# Altium PCB HIVE_SIGHT_PANEL ASCII REV Project_PCB_Rev.Project_SCH_Rev.PcbDoc
Units mm, origin at the board's own origin, x right, y up, seen from the top; angles counter-clockwise.
Board outline 177.8 x 133.25 mm, 4 copper layers (Top, GND, PWR, Bottom), stack 1.534 mm thick; 8 components, 195 nets, 6 pads, 0 vias.
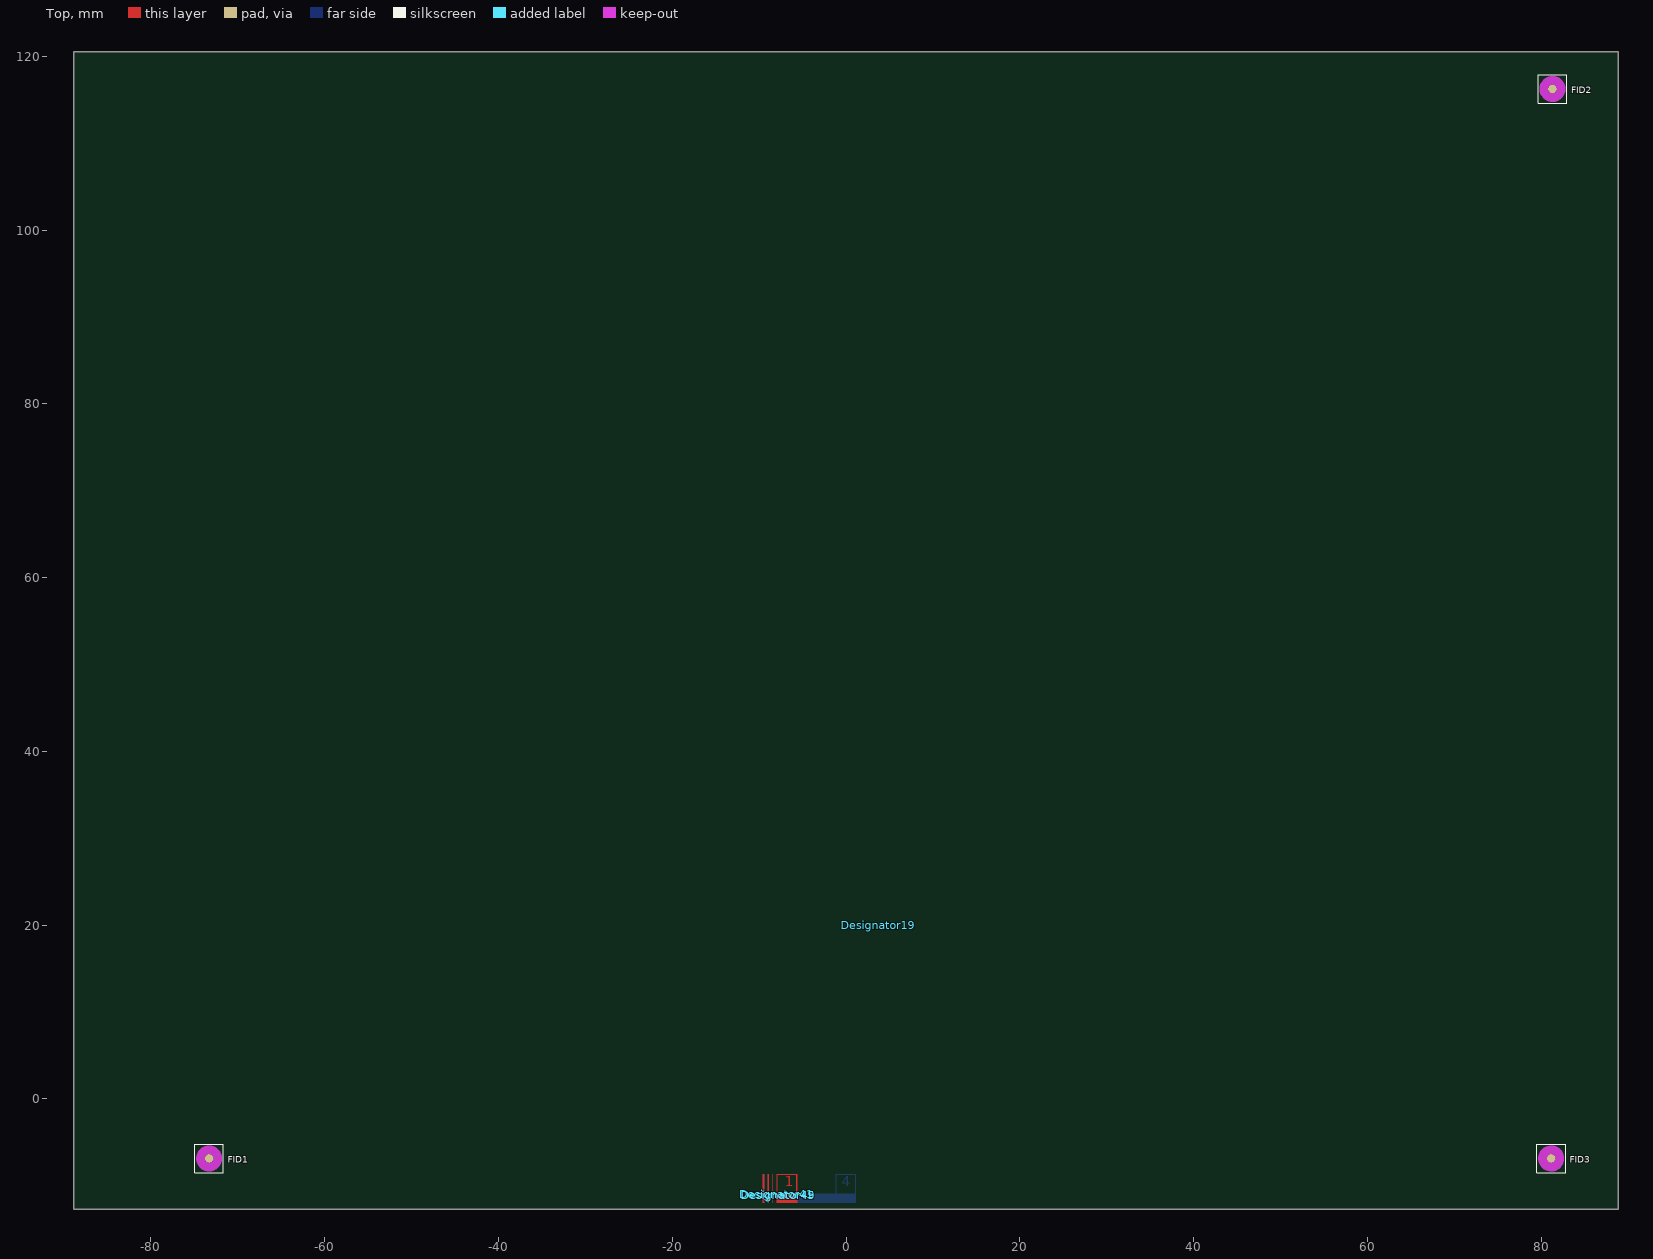
[diagram p0: Top view]
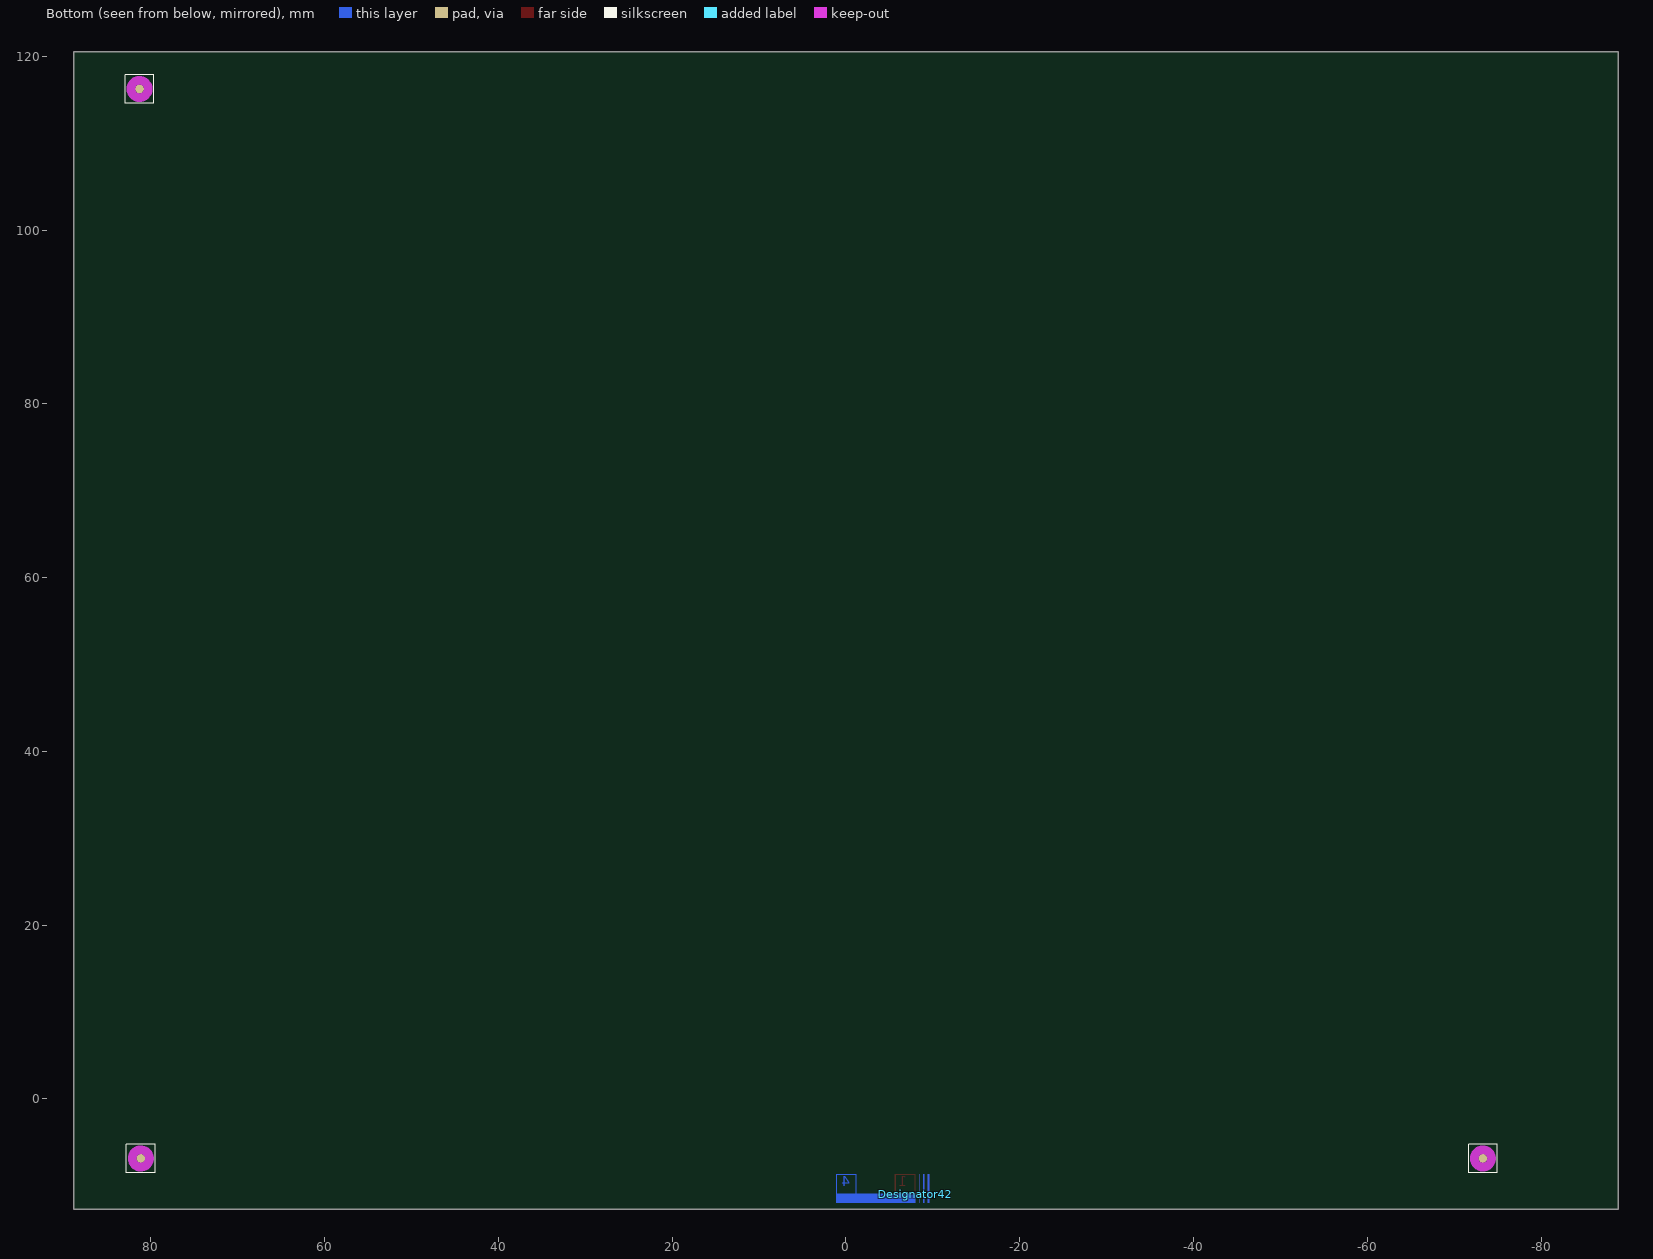
[diagram p1: Bottom view, seen from below]
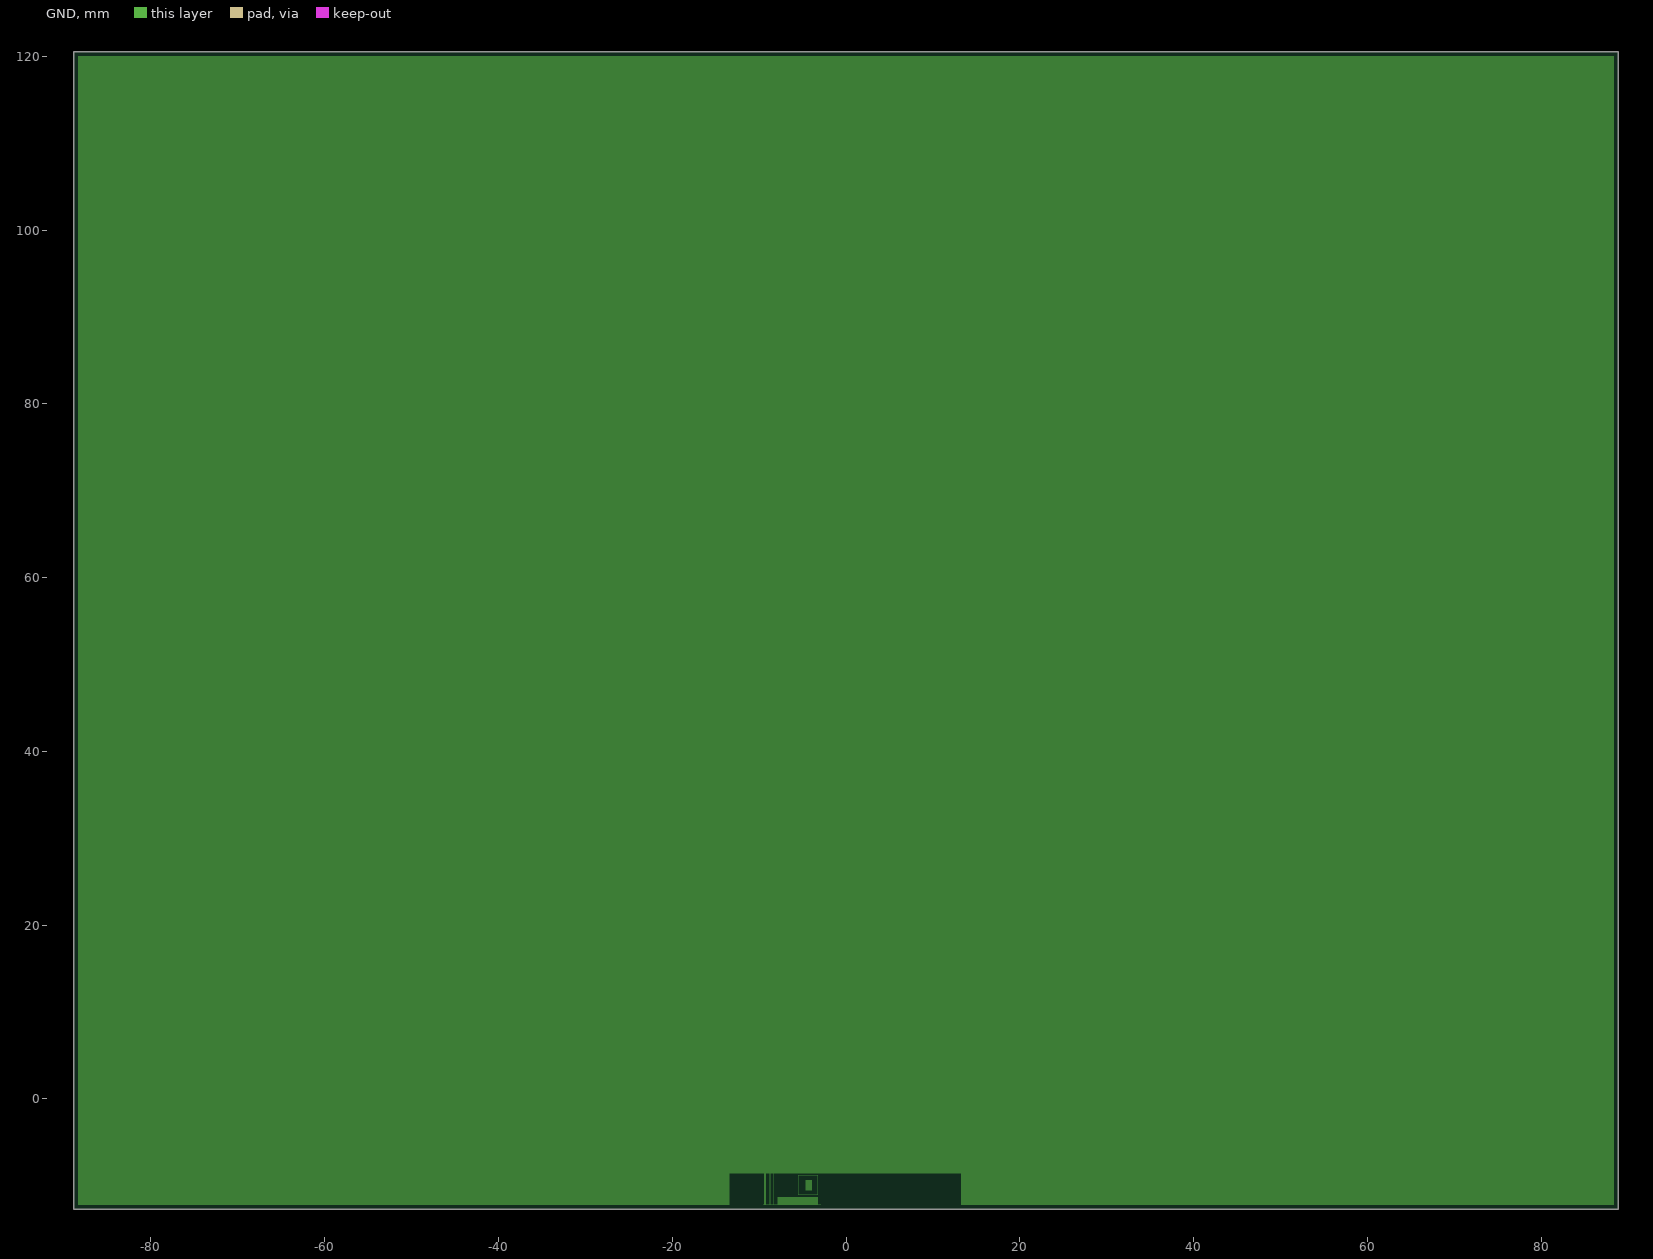
[diagram p2: GND, clearances drawn from the general rule]
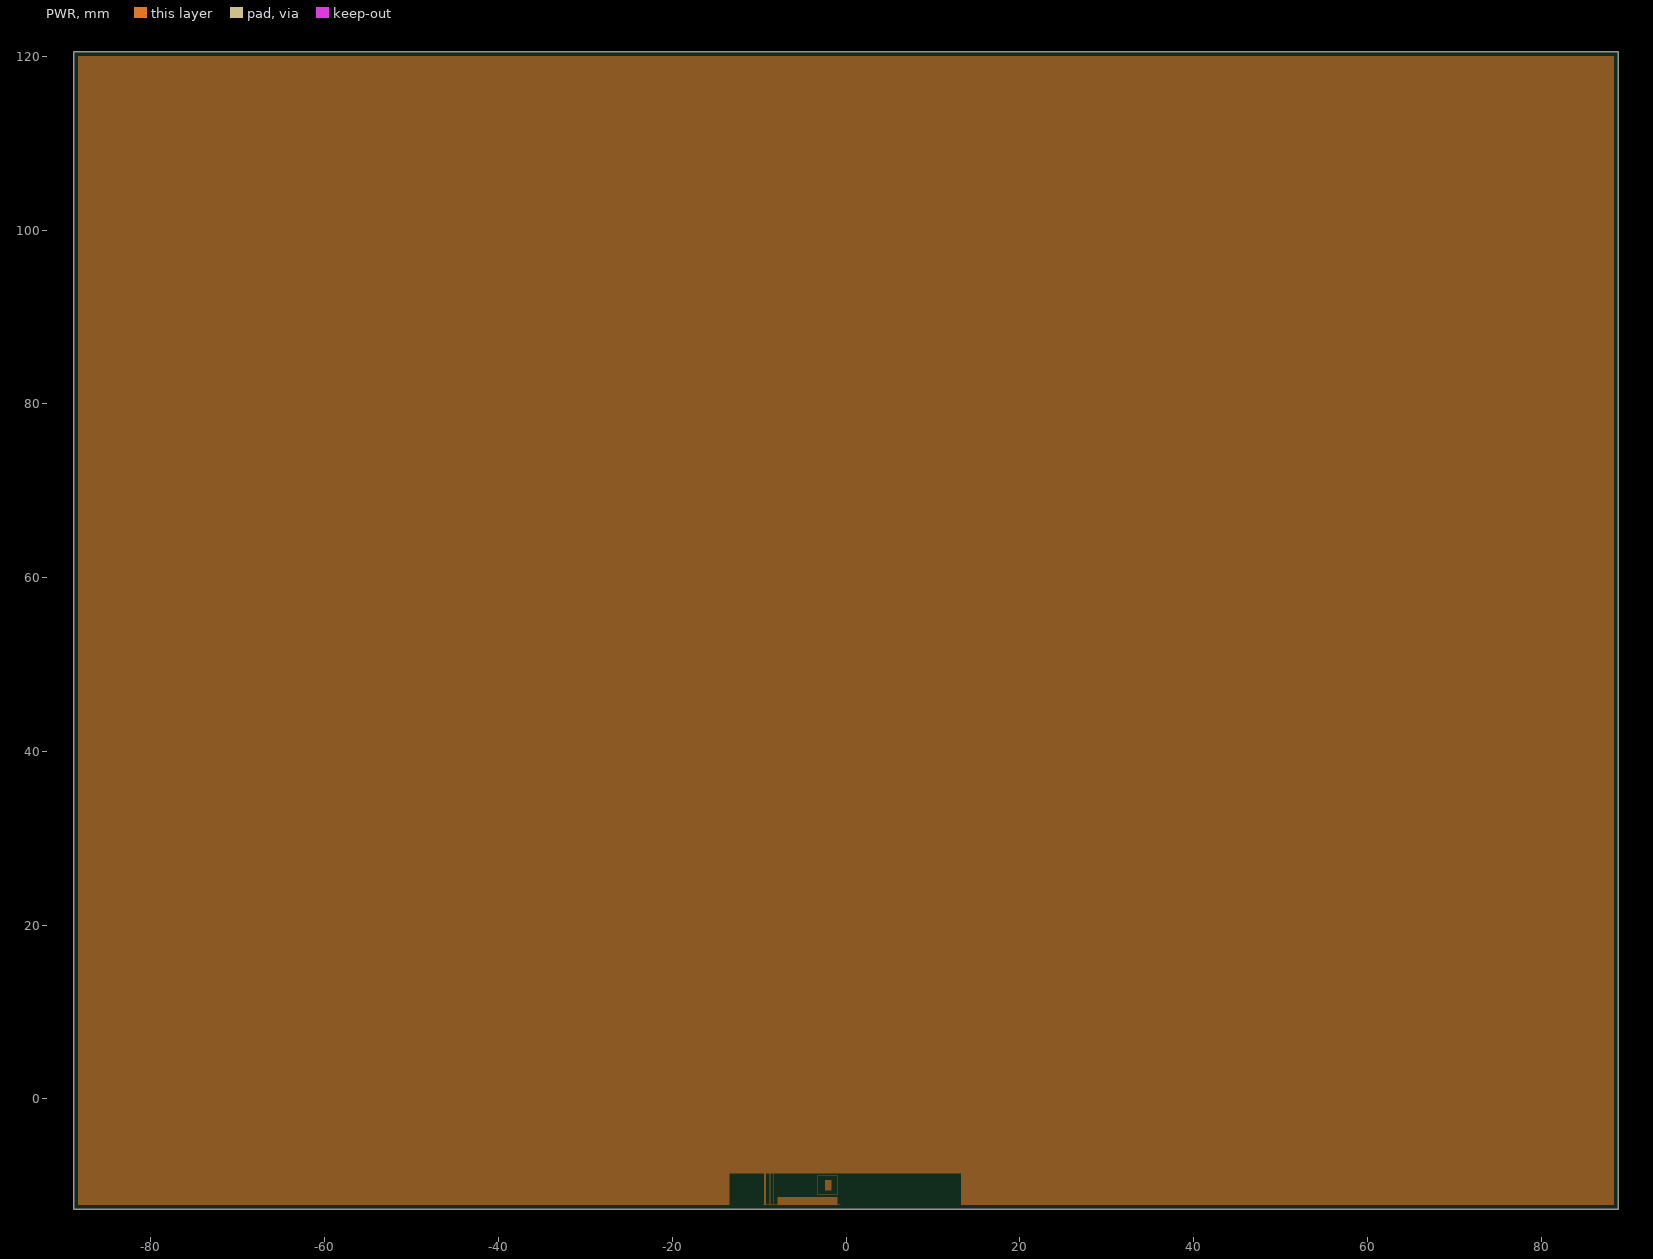
[diagram p3: PWR, clearances drawn from the general rule]

## Layer stack, top to bottom
Top Solder: solder mask 0.01, Solder Resist, Dk 3.5
Top: signal copper 0.035
Dielectric 1: prepreg 0.122, PP-006, Dk 4.2
GND: plane copper 0.035, net GND
Dielectric 2: core 1.15, Core-009, Dk 4.2
PWR: plane copper 0.035, net (Multiple Nets)
Dielectric 3: prepreg 0.122, PP-006, Dk 4.2
Bottom: signal copper 0.035
Bottom Solder: solder mask 0.01, Solder Resist, Dk 3.5

## Board outline
-88.9,-12.7 -88.9,120.549 88.9,120.549 88.9,-12.7

## Design rules (kind name [scope] priority, off if disabled: settings)
AssemblyTestPointUsage [All] p0: scope1count=1 scope1_0_kind=Board scope1_0_value=Board scope2count=1 scope2_0_kind=Board scope2_0_value=Board commentlength=0
AssemblyTestpoint [All] p0: scope1count=1 scope1_0_kind=Board scope1_0_value=Board scope2count=1 scope2_0_kind=Board scope2_0_value=Board commentlength=0
BoardOutlineClearance BoardOutlineClearance_NUCLEO [All] p0: scope1count=1 scope1_0_kind=Footprint scope1_0_value=MOD_NUCLEO-F429ZI scope2count=1 scope2_0_kind=Board scope2_0_value=Board commentlength=0 gap=0.381
BoardOutlineClearance BoardOutlineClearance-Fiducials [All] p0: scope1count=1 scope1_0_kind=ComponentClass scope1_0_value=Fiducials scope2count=1 scope2_0_kind=Board scope2_0_value=Board commentlength=0 gap=0.1
BoardOutlineClearance BoardOutlineClearance-Silk [All] p0 off: scope1count=1 scope1_0_kind=Board scope1_0_value=Board scope2count=1 scope2_0_kind=Board scope2_0_value=Board commentlength=94 gap=0.1 // Protel DXP Scope 1 Expression Was: (OnLayer('Bottom Overlay')) OR (OnLayer('Top Overlay'))
BoardOutlineClearance BoardOutlineClearance-MouseBites [All] p0: scope1count=1 scope1_0_kind=ComponentClass scope1_0_value=MouseBites scope2count=1 scope2_0_kind=Board scope2_0_value=Board commentlength=0 gap=0.254
BoardOutlineClearance [All] p0: scope1count=1 scope1_0_kind=Board scope1_0_value=Board scope2count=1 scope2_0_kind=Board scope2_0_value=Board commentlength=0 gap=0.5
BoardOutlineClearance BoardOutlineClearance_NUCLEO [HasFootprint('MOD_NUCLEO-F429ZI')] p1: gap=0.381 ignorepadtopadclearanceinfootprint=FALSE
BoardOutlineClearance BoardOutlineClearance-Silk [(OnLayer('Bottom Overlay')) OR (OnLayer('Top Overlay'))] p2: gap=0.1 ignorepadtopadclearanceinfootprint=FALSE
BoardOutlineClearance BoardOutlineClearance-Fiducials [InComponentClass('Fiducials')] p3: gap=0.1 ignorepadtopadclearanceinfootprint=FALSE
BoardOutlineClearance BoardOutlineClearance-MouseBites [InComponentClass('MouseBites')] p4: gap=0.254 ignorepadtopadclearanceinfootprint=FALSE except(0: Arc-SplitContinuation Track-SplitContinuation SMDPad-SplitContinuation THPad-OutlineEdge THPad-CavityEdge THPad-CutoutEdge THPad-SplitBarrior THPad-SplitContinuation Via-SplitContinuation Fill-SplitContinuation Poly-SplitContinuation Region-OutlineEdge Region-CavityEdge Region-CutoutEdge Region-SplitBarrior Region-SplitContinuation Text-SplitContinuation; 0.508: Arc-OutlineEdge Track-OutlineEdge SMDPad-OutlineEdge Via-OutlineEdge Fill-OutlineEdge Poly-OutlineEdge Text-OutlineEdge)
BoardOutlineClearance [All] p5: gap=0.5 ignorepadtopadclearanceinfootprint=FALSE
Clearance Clearance_1 [All] p0 off: scope1count=1 scope1_0_kind=Board scope1_0_value=Board scope2count=1 scope2_0_kind=Board scope2_0_value=Board commentlength=70 gap=0 // Protel DXP Scope 2 Expression Was: IsSMTPin Or IsThruPin  or IsVia
Clearance [All] p0: scope1count=1 scope1_0_kind=Board scope1_0_value=Board scope2count=1 scope2_0_kind=Board scope2_0_value=Board commentlength=0 gap=0.127
Clearance Clearance_1 [IsVia and (NOT InAnyComponent) vs IsSMTPin Or IsThruPin  or IsVia] p1: gap=0 ignorepadtopadclearanceinfootprint=FALSE except(0.051: SMDPad-Via THPad-Via; 0.152: Via-Via)
Clearance [All] p2: gap=0.127 ignorepadtopadclearanceinfootprint=FALSE
ComponentClearance [All] p0: scope1count=1 scope1_0_kind=Board scope1_0_value=Board scope2count=1 scope2_0_kind=Board scope2_0_value=Board commentlength=0 gap=0.102 collisioncheckmode=3
ComponentClearance [All] p1: gap=0.102 collisioncheckmode=3 verticalgap=0.102 showdistances=FALSE
DiffPairsRouting [All] p0: scope1count=1 scope1_0_kind=Board scope1_0_value=Board scope2count=1 scope2_0_kind=Board scope2_0_value=Board commentlength=0
DiffPairsRouting [All] p1: maxlimit=0.203 minlimit=0.203 mostfreqgap=0.203 toplayer_minwidth=0.102 toplayer_maxwidth=0.102 toplayer_prefwidth=0.102 bottomlayer_minwidth=0.102 bottomlayer_maxwidth=0.102 bottomlayer_prefwidth=0.102 maxuncoupledlength=12.7
FabricationTestPointUsage [All] p0: scope1count=1 scope1_0_kind=Board scope1_0_value=Board scope2count=1 scope2_0_kind=Board scope2_0_value=Board commentlength=0 valid=0 allowmultiple=FALSE
FabricationTestpoint [All] p0: scope1count=1 scope1_0_kind=Board scope1_0_value=Board scope2count=1 scope2_0_kind=Board scope2_0_value=Board commentlength=0 side=3 testpointundercomponent=TRUE minsize=1.016 maxsize=2.54 preferedsize=1.524 minholesize=0 maxholesize=1.016 preferedholesize=0.813 testpointgrid=0.025
FanoutControl Fanout_BGA [All] p0 off: scope1count=1 scope1_0_kind=Board scope1_0_value=Board scope2count=1 scope2_0_kind=Board scope2_0_value=Board commentlength=69 // Protel DXP Scope 1 Expression Was: IsBGA   Fanout_BGA (Default Rule)
FanoutControl Fanout_LCC [All] p0 off: scope1count=1 scope1_0_kind=Board scope1_0_value=Board scope2count=1 scope2_0_kind=Board scope2_0_value=Board commentlength=69 // Protel DXP Scope 1 Expression Was: IsLCC   Fanout_LCC (Default Rule)
FanoutControl Fanout_SOIC [All] p0 off: scope1count=1 scope1_0_kind=Board scope1_0_value=Board scope2count=1 scope2_0_kind=Board scope2_0_value=Board commentlength=71 // Protel DXP Scope 1 Expression Was: IsSOIC   Fanout_SOIC (Default Rule)
FanoutControl Fanout_Small [All] p0 off: scope1count=1 scope1_0_kind=Board scope1_0_value=Board scope2count=1 scope2_0_kind=Board scope2_0_value=Board commentlength=84 // Protel DXP Scope 1 Expression Was: (CompPinCount < 5)   Fanout_Small (Default Rule)
FanoutControl Fanout_Default [All] p0: scope1count=1 scope1_0_kind=Board scope1_0_value=Board scope2count=1 scope2_0_kind=Board scope2_0_value=Board commentlength=30 // Fanout_Default (Default Rule)
Height [All] p0: scope1count=1 scope1_0_kind=Board scope1_0_value=Board scope2count=1 scope2_0_kind=Board scope2_0_value=Board commentlength=0
HoleSize [All] p0: scope1count=1 scope1_0_kind=Board scope1_0_value=Board scope2count=1 scope2_0_kind=Board scope2_0_value=Board commentlength=0 absolutevalues=TRUE maxlimit=6 minlimit=0.25 maxpercent=80.000 minpercent=20.000
HoleSize [All] p1: absolutevalues=TRUE maxlimit=6 minlimit=0.25 maxpercent=80.000 minpercent=20.000
HoleToHoleClearance HoleToHoleClearance_1 [All] p0 off: scope1count=1 scope1_0_kind=Board scope1_0_value=Board scope2count=1 scope2_0_kind=Board scope2_0_value=Board commentlength=53 // Protel DXP Scope 2 Expression Was: InAnyComponent
HoleToHoleClearance [All] p0: scope1count=1 scope1_0_kind=Board scope1_0_value=Board scope2count=1 scope2_0_kind=Board scope2_0_value=Board commentlength=0
HoleToHoleClearance HoleToHoleClearance_Via [All] p0 off: scope1count=1 scope1_0_kind=Board scope1_0_value=Board scope2count=1 scope2_0_kind=Board scope2_0_value=Board commentlength=44 // Protel DXP Scope 2 Expression Was: IsVia
HoleToHoleClearance HoleToHoleClearance_1 [InAnyComponent vs InAnyComponent] p1: gap=0.203 allowstackedmicrovias=TRUE
HoleToHoleClearance HoleToHoleClearance_Via [IsVia vs IsVia] p2: gap=0.457 allowstackedmicrovias=TRUE
HoleToHoleClearance [All] p3: gap=0.457 allowstackedmicrovias=TRUE
LayerPairs [All] p0: scope1count=1 scope1_0_kind=Board scope1_0_value=Board scope2count=1 scope2_0_kind=Board scope2_0_value=Board commentlength=0 enforce=TRUE
MatchedLengths MatchedLengths_CLK [All] p0: scope1count=1 scope1_0_kind=NetClass scope1_0_value=CLK_DW scope2count=1 scope2_0_kind=Board scope2_0_value=Board commentlength=0 tolerance=0.025 amplitude=5.08 gap=0.508 style=90-Degree
MatchedLengths DiffMatching_32k [All] p0 off: scope1count=1 scope1_0_kind=Board scope1_0_value=Board scope2count=1 scope2_0_kind=Board scope2_0_value=Board commentlength=66 tolerance=0.25 amplitude=5.08 gap=0.508 style=90-Degree // Protel DXP Scope 1 Expression Was: InDifferentialPair('32K_X')
MatchedLengths DiffMatching_WithinPair [All] p0 off: scope1count=1 scope1_0_kind=Board scope1_0_value=Board scope2count=1 scope2_0_kind=Board scope2_0_value=Board commentlength=70 tolerance=0.025 amplitude=5.08 gap=0.508 style=90-Degree // Protel DXP Scope 1 Expression Was: Not InDifferentialPair('32K_X')
MatchedLengths MatchedLengths_CLK [InNetClass('CLK_DW')] p1: tolerance=0.025 checknetsindiffpair=FALSE checkdiffpairvsdiffpair=TRUE checkxsignals=TRUE checkothers=TRUE
MatchedLengths DiffMatching_32k [InDifferentialPair('32K_X')] p2: tolerance=0.25 checknetsindiffpair=TRUE checkdiffpairvsdiffpair=FALSE checkxsignals=FALSE checkothers=FALSE
MatchedLengths DiffMatching_WithinPair [Not InDifferentialPair('32K_X')] p3: tolerance=0.025 checknetsindiffpair=TRUE checkdiffpairvsdiffpair=FALSE checkxsignals=FALSE checkothers=FALSE
MinimumSolderMaskSliver [All] p0: scope1count=1 scope1_0_kind=Board scope1_0_value=Board scope2count=1 scope2_0_kind=Board scope2_0_value=Board commentlength=0
MinimumSolderMaskSliver [All] p1: minsoldermaskwidth=0.1
NetAntennae [All] p0: scope1count=1 scope1_0_kind=Board scope1_0_value=Board scope2count=1 scope2_0_kind=Board scope2_0_value=Board commentlength=0
PasteMaskExpansion [All] p0: scope1count=1 scope1_0_kind=Board scope1_0_value=Board scope2count=1 scope2_0_kind=Board scope2_0_value=Board commentlength=0 expansion=0
PlaneClearance [All] p0: scope1count=1 scope1_0_kind=Board scope1_0_value=Board scope2count=1 scope2_0_kind=Board scope2_0_value=Board commentlength=0 clearance=0.203
PlaneClearance [All] p1: clearance=0.203
PlaneConnect [All] p0: scope1count=1 scope1_0_kind=Board scope1_0_value=Board scope2count=1 scope2_0_kind=Board scope2_0_value=Board commentlength=0 planeconnectstyle=Direct reliefexpansion=0.508 reliefentries=4 reliefconductorwidth=0.254 reliefairgap=0.254
PlaneConnect [All] p1: planeconnectstyle=Direct reliefexpansion=0.508 reliefentries=4 reliefconductorwidth=0.254 reliefairgap=0.254
PolygonConnect [All] p0: scope1count=1 scope1_0_kind=Board scope1_0_value=Board scope2count=1 scope2_0_kind=Board scope2_0_value=Board commentlength=0 connectstyle=Direct reliefconductorwidth=0.254 reliefentries=4 polygonreliefangle="90 Angle"
PolygonConnect [All] p1: connectstyle=Direct reliefconductorwidth=0.254 reliefentries=4 polygonreliefangle="90 Angle" airgapwidth=0.254
RoutingCorners [All] p0: scope1count=1 scope1_0_kind=Board scope1_0_value=Board scope2count=1 scope2_0_kind=Board scope2_0_value=Board commentlength=0 cornerstyle=45-Degree minsetback=2.54 maxsetback=2.54
RoutingLayers [All] p0: scope1count=1 scope1_0_kind=Board scope1_0_value=Board scope2count=1 scope2_0_kind=Board scope2_0_value=Board commentlength=0 top layer=Automatic bottom layer=Automatic
RoutingPriority [All] p0: scope1count=1 scope1_0_kind=Board scope1_0_value=Board scope2count=1 scope2_0_kind=Board scope2_0_value=Board commentlength=0
RoutingTopology [All] p0: scope1count=1 scope1_0_kind=Board scope1_0_value=Board scope2count=1 scope2_0_kind=Board scope2_0_value=Board commentlength=0 topology=Shortest
RoutingVias [All] p0: scope1count=1 scope1_0_kind=Board scope1_0_value=Board scope2count=1 scope2_0_kind=Board scope2_0_value=Board commentlength=0 holewidth=0.5 width=1 viastyle="Through Hole" minholewidth=0.3 minwidth=0.5 maxholewidth=0.3 maxwidth=0.5
RoutingVias [All] p1: holewidth=0.5 width=1 viastyle="Through Hole" minholewidth=0.3 minwidth=0.5 maxholewidth=0.3 maxwidth=0.5
ShortCircuit [All] p0: scope1count=1 scope1_0_kind=Board scope1_0_value=Board scope2count=1 scope2_0_kind=Board scope2_0_value=Board commentlength=0 allowed=FALSE
SilkToBoardRegionClearance [All] p0: scope1count=1 scope1_0_kind=Board scope1_0_value=Board scope2count=1 scope2_0_kind=Board scope2_0_value=Board commentlength=0
SilkToSilkClearance [All] p0: scope1count=1 scope1_0_kind=Board scope1_0_value=Board scope2count=1 scope2_0_kind=Board scope2_0_value=Board commentlength=0
SilkToSilkClearance [All] p1: silktosilkclearance=0.1
SilkToSolderMaskClearance [All] p0 off: scope1count=1 scope1_0_kind=Board scope1_0_value=Board scope2count=1 scope2_0_kind=Board scope2_0_value=Board commentlength=44 // Protel DXP Scope 1 Expression Was: IsPad
SilkToSolderMaskClearance [IsPad] p1: minsilkscreentomaskgap=0.01 clearancetoexposedcopper=FALSE
SolderMaskExpansion SolderMaskExpansion_1 [All] p0 off: scope1count=1 scope1_0_kind=Board scope1_0_value=Board scope2count=1 scope2_0_kind=Board scope2_0_value=Board commentlength=69 expansion=0.102 // Protel DXP Scope 1 Expression Was: IsVia AND (NOT InAnyComponent)
SolderMaskExpansion [All] p0: scope1count=1 scope1_0_kind=Board scope1_0_value=Board scope2count=1 scope2_0_kind=Board scope2_0_value=Board commentlength=0 expansion=0.051
SolderMaskExpansion SolderMaskExpansion_1 [IsVia AND (NOT InAnyComponent)] p1: expansion=0.102 istentingtop=TRUE
SolderMaskExpansion [All] p2: expansion=0.051 istentingtop=FALSE
UnRoutedNet [All] p0: scope1count=1 scope1_0_kind=Board scope1_0_value=Board scope2count=1 scope2_0_kind=Board scope2_0_value=Board commentlength=0
UnpouredPolygon [All] p0: scope1count=1 scope1_0_kind=Board scope1_0_value=Board scope2count=1 scope2_0_kind=Board scope2_0_value=Board commentlength=0
Width [All] p0: scope1count=1 scope1_0_kind=Board scope1_0_value=Board scope2count=1 scope2_0_kind=Board scope2_0_value=Board commentlength=0 maxlimit=25.4 minlimit=0.203 preferedwidth=0.203
Width [All] p1: maxlimit=25.4 minlimit=0.203 preferedwidth=0.203 minimp=50.000000 maximp=50.000000 favimp=50.000000
21 further rules are at their usual default settings.

## Classes and differential pairs
net class CLK_DW: NetC65_1 NetC66_1
component class TOP: MEC?
differential pair W_32K_X: +W_32K_X_P -W_32K_X_N
differential pair XTAL: +XTAL_P -XTAL_N
differential pair USB_D: +USB_D_P -USB_D_N
differential pair RFB: +RFB_P -RFB_N
differential pair RFA: +RFA_P -RFA_N
differential pair " ": +32K_X_P -32K_X_N

## Components (designator, comment, footprint, x,y, rotation, side; value= is the part's Value field where it differs from the comment)
Designator19 "Comment" STN_STENCIL_TOP_FRAMEWORK_420X520MM 3.733,20 r0 top
Designator41 "Comment" LYR-MARKER-SIGNAL-1 -7.985,-10.983 r0 top
Designator42 "Comment" LYR-MARKER-SIGNAL-4 -7.985,-10.983 r0 bottom
Designator45 "Comment" LYR-MARKER-PLANE-2 -7.812,-11.108 r0 top
Designator49 "Comment" LYR-MARKER-PLANE-3 -7.812,-11.108 r0 top
FID1 "Comment" "FID_CIRCLE_1MM - PASTE_MASK" -73.308,-6.843 r180 top
FID2 "Comment" "FID_CIRCLE_1MM - PASTE_MASK" 81.309,116.245 r180 top
FID3 "Comment" "FID_CIRCLE_1MM - PASTE_MASK" 81.166,-6.843 r180 top

## Footprints (in the part's own frame and the unit in brackets; to place one, negate y for a bottom-side part, rotate by r counter-clockwise, add the part's x,y. Pads: shape width x height; smd on the part's side, far side on the other; paste and mask are expansions set on the pad)
"FID_CIRCLE_1MM - PASTE_MASK" [mm]
  round 1 smd paste-1 mask+0: 1(0,0)
  round 1 smd far side paste-1 mask+0: 2(0,0)
  Top keep-out circle w1: c0,0 r1
  Bottom keep-out circle w1: c0,0 r1
  silkscreen extent -1.65,-1.65 1.65,1.65
LYR-MARKER-PLANE-2 [mm]
  GND region: 4.5,2.25 3.923,2.25 3.923,0.125 4.5,0.125
  GND region: -1.8,-1 -1.627,-1 -1.627,2.5 -1.8,2.5
  GND region: -1.373,-1 -1.026,-1 -1.026,2.5 -1.373,2.5
  GND region: -0.874,-1 -0.551,-1 -0.551,2.5 -0.874,2.5
  GND region: -0.449,-1 -0.125,-1 -0.125,2.5 -0.449,2.5
  GND region: -0.125,-0.125 2.25,-0.125 2.25,2.5 -0.125,2.5
  GND region: 4.625,-1 5,-1 5,2.5 4.625,2.5
  GND region: 4.75,2.375 4.75,2.5 2.125,2.5 2.125,2.375
  GND region: 2.375,0.125 3.103,0.125 3.103,2.25 2.375,2.25
  GND region: 4.5,1.83 4.5,2.25 2.375,2.25 2.375,1.83
  GND region: 2.375,0.552 2.375,0.125 4.5,0.125 4.5,0.552
  GND region: 2.125,-0.125 2.25,-0.125 2.25,2.5 2.125,2.5
  GND region: 4.75,-0.125 4.75,0 2.125,0 2.125,-0.125
LYR-MARKER-PLANE-3 [mm]
  PWR region: 6.75,1.83 6.75,2.25 4.625,2.25 4.625,1.83
  PWR region: -0.125,-0.125 4.399,-0.125 4.399,2.5 -0.125,2.5
  PWR region: -0.449,-1 -0.125,-1 -0.125,2.5 -0.449,2.5
  PWR region: 4.375,-0.125 4.5,-0.125 4.5,2.5 4.375,2.5
  PWR region: 6.75,2.25 6.189,2.25 6.189,0.125 6.75,0.125
  PWR region: -1.8,-1 -1.627,-1 -1.627,2.5 -1.8,2.5
  PWR region: 2.125,-0.125 2.25,-0.125 2.25,2.5 2.125,2.5
  PWR region: 4.625,0.552 4.625,0.125 6.75,0.125 6.75,0.552
  PWR region: -1.373,-1 -1.026,-1 -1.026,2.5 -1.373,2.5
  PWR region: 7,2.375 7,2.5 4.375,2.5 4.375,2.375
  PWR region: 7,-0.125 7,0 4.375,0 4.375,-0.125
  PWR region: -0.874,-1 -0.551,-1 -0.551,2.5 -0.874,2.5
  PWR region: 4.625,0.125 5.356,0.125 5.356,2.25 4.625,2.25
  PWR region: 6.875,-1 7.25,-1 7.25,2.5 6.875,2.5
LYR-MARKER-SIGNAL-1 [mm]
  Top region: -0.551,-1 -0.449,-1 -0.449,2.375 -0.551,2.375
  Top region: -1.026,-1 -0.874,-1 -0.874,2.375 -1.026,2.375
  Top region: -1.627,-1 -1.373,-1 -1.373,2.375 -1.627,2.375
  Top region: 0,0 0.125,0 0.125,2.375 0,2.375
  Top region: 2.375,2.25 2.375,2.375 0,2.375 0,2.25
  Top region: 2.375,2.375 2.25,2.375 2.25,0 2.375,0
  Top region: 0,0.125 0,-1 2.375,-1 2.375,0.125
  Top region: 2.25,0 2.375,0 2.375,2.375 2.25,2.375
LYR-MARKER-SIGNAL-4 [mm]
  Top region: -1.627,1 -1.373,1 -1.373,-2.375 -1.627,-2.375
  Top region: -1.026,1 -0.874,1 -0.874,-2.375 -1.026,-2.375
  Top region: -0.551,1 -0.449,1 -0.449,-2.375 -0.551,-2.375
  Top region: 6.875,-2.375 6.75,-2.375 6.75,0 6.875,0
  Top region: 0,-0.125 0,1 9.125,1 9.125,-0.125
  Top region: 9.125,-2.375 9,-2.375 9,0 9.125,0
  Top region: 9.125,-2.25 9.125,-2.375 6.75,-2.375 6.75,-2.25
  Top region: 9,0 9.125,0 9.125,-2.375 9,-2.375
STN_STENCIL_TOP_FRAMEWORK_420X520MM [mm] "MEC - STENCIL PASTE FRAMEWORK"

## Nets (pads, with @x,y where several pads share a name; then routed paths per layer and width w, separated by ;. In a path a pad name is that pad's centre, name@x,y a point inside that pad or via, vN(x,y) a via of type N, cw(c..) or ccw(c..) an arc to the next point about the centre after c; other vN are vias at no path point)
1V8: 
3V3: 
3V3_INT: 
3V3_NUC: 
3V3_SDIO: 
3V3_WIFI: 
5V_CONN: 
5V_IN: 
5V_NUC: 
5V_OV_G1: 
5V_OV_G2: 
5V_POL: 
5V_POL_G: 
5V_PROT: 
5V_USB: 
32K_X_N: 
32K_X_P: 
ANT_OUT: 
CHIP_PU: 
GND: 
IMU_INT1: 
IMU_INT2: 
IMU_SCL: 
IMU_SDA: 
JTAG_TCK: 
JTAG_TCK_SW: 
JTAG_TDI: 
JTAG_TDI_SW: 
JTAG_TDO: 
JTAG_TDO_SW: 
JTAG_TMS: 
JTAG_TMS_SW: 
LED_RX_A: 
LED_RX_B: 
LED_RX_OK_A: 
LED_RX_OK_B: 
LED_SFD_A: 
LED_SFD_B: 
LED_TX_A: 
LED_TX_B: 
LNA_IN: 
NetC6_1: 
NetC7_1: 
NetC8_1: 
NetC9_1: 
NetC10_2: 
NetC15_2: 
NetC16_1: 
NetC18_1: 
NetC19_1: 
NetC20_2: 
NetC27_1: 
NetC28_1: 
NetC30_1: 
NetC32_2: 
NetC33_1: 
NetC34_1: 
NetC36_1: 
NetC37_1: 
NetC38_1: 
NetC39_1: 
NetC40_2: 
NetC45_2: 
NetC47_1: 
NetC48_2: 
NetC54_1: 
NetC55_1: 
NetC57_1: 
NetC58_1: 
NetC60_1: 
NetC62_2: 
NetC63_1: 
NetC64_1: 
NetC65_1: 
NetC65_2: 
NetC66_1: 
NetC72_1: 
NetC72_2: 
NetC74_2: 
NetC83_1: 
NetC83_2: 
NetD3_A: 
NetD4_A: 
NetD5_A: 
NetD5_K: 
NetD6_A: 
NetD7_A: 
NetD8_A: 
NetD9_A: 
NetD10_A: 
NetD11_A: 
NetD12_A: 
NetD13_A: 
NetD17_A: 
NetD19_A: 
NetD20_A: 
NetD21_A: 
NetJ7_1: 
NetJ8_1: 
NetR14_2: 
NetR21_2: 
NetR23_1: 
NetR23_2: 
NetR25_1: 
NetR26_2: 
NetR34_1: 
NetR38_1: 
NetR38_2: 
NetR39_2: 
NetR40_2: 
NetR41_1: 
NetR46_1: 
NetR46_2: 
NetR47_2: 
NetR48_1: 
NetR49_1: 
NetR50_1: 
NetR51_1: 
NetU1_3: 
NetU2_1: 
NetU3_21: 
NetU3_23: 
NetU3_24: 
NetU3_29: 
NetU3_30: 
NetU3_33: 
NetU3_34: 
NetU3_39: 
NetU3_40: 
NetU3_41: 
NetU3_45: 
NetU4_21: 
NetU4_23: 
NetU4_24: 
NetU4_30: 
NetU4_33: 
NetU4_34: 
NetU4_45: 
NetU6_2: 
NetU7_3: 
NetU7_6: 
NetU9_16: 
NetU9_23: 
NetU9_27: 
NetU11_12: 
NetU12_3: 
NetU12_7: 
NetU13_CN7-17: 
NetU13_CN8-6: 
NetU13_CN8-8: 
NetU13_CN8-10: 
NetU13_CN9-1: 
NetU13_CN9-2: 
NetU13_CN9-3: 
RFA_N: 
RFA_P: 
RFB_N: 
RFB_P: 
RST_A#: 
RST_B#: 
RXT_USB: 
SHIELD_USB: 
SPI_CLK: 
SPI_CS0: 
SPI_D: 
SPI_HD: 
SPI_Q: 
SPI_WP: 
TXT_USB: 
UART_SEL: 
UART_USB_RX: 
UART_USB_TX: 
USB_D_N: 
USB_D_P: 
USER_LED: 
VDDCLK_A: 
VDDCLK_B: 
VDDVCO_A: 
VDDVCO_B: 
VSPI_CLK: 
VSPI_CS0: 
VSPI_D: 
VSPI_Q: 
W_32K_X_N: 
W_32K_X_P: 
W_CHIP_PU: 
W_USER_LED: 
WROOM_Rx: 
WROOM_TCK: 
WROOM_TDI: 
WROOM_TDO: 
WROOM_TMS: 
WROOM_Tx: 
XTAL_N: 
XTAL_P: 
pads on no net: FID1.1 FID1.2 FID2.1 FID2.2 FID3.1 FID3.2
copper on no net: | length 12288.7
  Top w0.025: 343.542,-49.469 429.417,36.405 ; 343.542,-47.945 427.893,36.405 ; 343.542,-46.421 426.369,36.405 ; 343.542,-44.897 424.845,36.405 ; 343.542,-43.373 423.321,36.405 ; 343.542,-41.849 421.797,36.405 ; 343.542,-40.325 420.273,36.405 ; 343.542,-38.801 418.749,36.405 ; 343.542,-37.277 417.225,36.405 ; 343.542,-35.753 415.701,36.405 ; 343.542,-34.229 414.177,36.405 ; 343.542,-32.705 412.653,36.405 ; 343.542,-31.181 411.129,36.405 ; 343.542,-29.657 409.605,36.405 ; 343.542,-28.133 408.081,36.405 ; 343.542,-26.609 406.557,36.405 ; 343.542,-25.085 405.033,36.405 ; 343.542,-23.561 403.509,36.405 ; 343.542,-22.037 401.985,36.405 ; 343.542,-20.513 400.461,36.405 ; 343.542,-18.989 398.937,36.405 ; 343.542,-17.465 397.413,36.405 ; 343.542,-15.941 395.889,36.405 ; 343.542,-14.417 394.365,36.405 ; 343.542,-12.893 392.841,36.405 ; 343.542,-11.369 391.317,36.405 ; 343.542,-9.845 389.793,36.405 ; 343.542,-8.321 388.269,36.405 ; 343.542,-6.797 386.745,36.405 ; 343.542,-5.273 385.221,36.405 ; 343.542,-3.749 383.697,36.405 ; 343.542,-2.225 382.173,36.405 ; 343.542,-0.701 380.649,36.405 ; 343.542,0.823 379.125,36.405 ; 343.542,2.347 377.601,36.405 ; 343.542,3.871 376.077,36.405 ; 343.542,5.395 374.553,36.405 ; 343.542,6.919 373.029,36.405 ; 343.542,8.443 371.505,36.405 ; 343.542,9.967 369.981,36.405 ; 343.542,11.491 368.457,36.405 ; 343.542,13.015 366.933,36.405 ; 343.542,14.539 365.409,36.405 ; 343.542,16.063 363.885,36.405 ; 343.542,17.587 362.361,36.405 ; 343.542,19.111 360.837,36.405 ; 343.542,20.635 359.313,36.405 ; 343.542,22.159 357.789,36.405 ; 343.542,23.683 356.265,36.405 ; 343.542,25.207 354.741,36.405 ; 343.542,26.731 353.217,36.405 ; 343.542,28.255 351.693,36.405 ; 343.542,29.779 350.169,36.405 ; 343.542,31.303 348.645,36.405 ; 343.542,32.827 347.121,36.405 ; 343.542,34.351 345.597,36.405 ; 343.542,35.875 344.073,36.405 ; 344.514,-50.021 430.941,36.405 ; 346.038,-50.021 432.465,36.405 ; 347.562,-50.021 433.989,36.405 ; 349.086,-50.021 435.513,36.405 ; 350.61,-50.021 437.037,36.405 ; 352.134,-50.021 438.561,36.405 ; 353.658,-50.021 440.085,36.405 ; 355.182,-50.021 441.609,36.405 ; 356.706,-50.021 443.133,36.405 ; 358.23,-50.021 444.657,36.405 ; 359.754,-50.021 446.181,36.405 ; 361.278,-50.021 447.705,36.405 ; 362.802,-50.021 449.229,36.405 ; 364.326,-50.021 450.753,36.405 ; 365.85,-50.021 452.277,36.405 ; 367.374,-50.021 453.801,36.405 ; 368.898,-50.021 455.325,36.405 ; 370.422,-50.021 456.849,36.405 ; 371.946,-50.021 458.373,36.405 ; 373.47,-50.021 458.828,35.336 ; 374.994,-50.021 458.828,33.812 ; 376.518,-50.021 458.828,32.288 ; 378.042,-50.021 458.828,30.764 ; 379.566,-50.021 458.828,29.24 ; 381.09,-50.021 458.828,27.716 ; 382.614,-50.021 458.828,26.192 ; 384.138,-50.021 458.828,24.668 ; 385.662,-50.021 458.828,23.144 ; 387.186,-50.021 458.828,21.62 ; 388.71,-50.021 458.828,20.096 ; 390.234,-50.021 458.828,18.572 ; 391.758,-50.021 458.828,17.048 ; 393.282,-50.021 458.828,15.524 ; 394.806,-50.021 458.828,14 ; 396.33,-50.021 458.828,12.476 ; 397.854,-50.021 458.828,10.952 ; 399.378,-50.021 458.828,9.428 ; 400.902,-50.021 458.828,7.904 ; 402.426,-50.021 458.828,6.38 ; 403.95,-50.021 458.828,4.856 ; 405.474,-50.021 458.828,3.332 ; 406.998,-50.021 458.828,1.808 ; 408.522,-50.021 458.828,0.284 ; 410.046,-50.021 458.828,-1.24 ; 411.57,-50.021 458.828,-2.764 ; 413.094,-50.021 458.828,-4.288 ; 414.618,-50.021 458.828,-5.812 ; 416.142,-50.021 458.828,-7.336 ; 417.666,-50.021 458.828,-8.86 ; 419.19,-50.021 458.828,-10.384 ; 420.714,-50.021 458.828,-11.908 ; 422.238,-50.021 458.828,-13.432 ; 423.762,-50.021 458.828,-14.956 ; 425.286,-50.021 458.828,-16.48 ; 426.81,-50.021 458.828,-18.004 ; 428.334,-50.021 458.828,-19.528 ; 429.858,-50.021 458.828,-21.052 ; 430.388,37.669 432.92,40.201 435.968,43.249 439.016,46.297 442.064,49.345 445.112,52.393 448.16,55.441 451.208,58.489 454.256,61.537 457.304,64.585 458.828,66.109 ; 430.388,39.193 431.396,40.201 434.444,43.249 437.492,46.297 440.54,49.345 443.588,52.393 446.636,55.441 449.684,58.489 452.732,61.537 455.78,64.585 458.828,67.633 ; 430.388,40.717 432.92,43.249 435.968,46.297 439.016,49.345 442.064,52.393 445.112,55.441 448.16,58.489 451.208,61.537 454.256,64.585 457.304,67.633 458.828,69.157 ; 430.388,42.241 431.396,43.249 434.444,46.297 437.492,49.345 440.54,52.393 443.588,55.441 446.636,58.489 449.684,61.537 452.732,64.585 455.78,67.633 458.828,70.681 ; 430.388,43.765 432.92,46.297 435.968,49.345 439.016,52.393 442.064,55.441 445.112,58.489 448.16,61.537 451.208,64.585 454.256,67.633 457.304,70.681 ; 430.388,45.289 431.396,46.297 434.444,49.345 437.492,52.393 440.54,55.441 443.588,58.489 446.636,61.537 449.684,64.585 452.732,67.633 455.78,70.681 ; 430.388,46.813 432.92,49.345 435.968,52.393 439.016,55.441 442.064,58.489 445.112,61.537 448.16,64.585 451.208,67.633 454.256,70.681 ; 430.388,48.337 431.396,49.345 434.444,52.393 437.492,55.441 440.54,58.489 443.588,61.537 446.636,64.585 449.684,67.633 452.732,70.681 ; 430.388,49.861 432.92,52.393 435.968,55.441 439.016,58.489 442.064,61.537 445.112,64.585 448.16,67.633 451.208,70.681 ; 430.388,51.385 431.396,52.393 434.444,55.441 437.492,58.489 440.54,61.537 443.588,64.585 446.636,67.633 449.684,70.681 ; 430.388,52.909 432.92,55.441 435.968,58.489 439.016,61.537 442.064,64.585 445.112,67.633 448.16,70.681 ; 430.388,54.433 431.396,55.441 434.444,58.489 437.492,61.537 440.54,64.585 443.588,67.633 446.636,70.681 ; 430.388,55.957 432.92,58.489 435.968,61.537 439.016,64.585 442.064,67.633 445.112,70.681 ; 430.388,57.481 431.396,58.489 434.444,61.537 437.492,64.585 440.54,67.633 443.588,70.681 ; 430.388,59.005 432.92,61.537 435.968,64.585 439.016,67.633 442.064,70.681 ; 430.388,60.529 431.396,61.537 434.444,64.585 437.492,67.633 440.54,70.681 ; 430.388,62.053 432.92,64.585 435.968,67.633 439.016,70.681 ; 430.388,63.577 431.396,64.585 434.444,67.633 437.492,70.681 ; 430.388,65.101 432.92,67.633 435.968,70.681 ; 430.388,66.625 431.396,67.633 434.444,70.681 ; 430.388,68.149 432.92,70.681 ; 430.388,69.673 431.396,70.681 ; 431.382,-50.021 458.828,-22.576 ; 431.396,37.153 434.444,40.201 437.492,43.249 440.54,46.297 443.588,49.345 446.636,52.393 449.684,55.441 452.732,58.489 455.78,61.537 458.828,64.585 ; 432.906,-50.021 458.828,-24.1 ; 432.92,37.153 435.968,40.201 439.016,43.249 442.064,46.297 445.112,49.345 448.16,52.393 451.208,55.441 454.256,58.489 457.304,61.537 458.828,63.061 ; 434.43,-50.021 458.828,-25.624 ; 434.444,37.153 437.492,40.201 440.54,43.249 443.588,46.297 446.636,49.345 449.684,52.393 452.732,55.441 455.78,58.489 458.828,61.537 ; 435.954,-50.021 458.828,-27.148 ; 435.968,37.153 439.016,40.201 442.064,43.249 445.112,46.297 448.16,49.345 451.208,52.393 454.256,55.441 457.304,58.489 458.828,60.013 ; 437.478,-50.021 458.828,-28.672 ; 437.492,37.153 440.54,40.201 443.588,43.249 446.636,46.297 449.684,49.345 452.732,52.393 455.78,55.441 458.828,58.489 ; 439.002,-50.021 458.828,-30.196 ; 439.016,37.153 442.064,40.201 445.112,43.249 448.16,46.297 451.208,49.345 454.256,52.393 457.304,55.441 458.828,56.965 ; 440.526,-50.021 458.828,-31.72 ; 440.54,37.153 443.588,40.201 446.636,43.249 449.684,46.297 452.732,49.345 455.78,52.393 458.828,55.441 ; 442.05,-50.021 458.828,-33.244 ; 442.064,37.153 445.112,40.201 448.16,43.249 451.208,46.297 454.256,49.345 457.304,52.393 458.828,53.917 ; 443.574,-50.021 458.828,-34.768 ; 443.588,37.153 446.636,40.201 449.684,43.249 452.732,46.297 455.78,49.345 458.828,52.393 ; 445.098,-50.021 458.828,-36.292 ; 445.112,37.153 448.16,40.201 451.208,43.249 454.256,46.297 457.304,49.345 458.828,50.869 ; 446.622,-50.021 458.828,-37.816 ; 446.636,37.153 449.684,40.201 452.732,43.249 455.78,46.297 458.828,49.345 ; 448.146,-50.021 458.828,-39.34 ; 448.16,37.153 451.208,40.201 454.256,43.249 457.304,46.297 458.828,47.821 ; 449.67,-50.021 458.828,-40.864 ; 449.684,37.153 452.732,40.201 455.78,43.249 458.828,46.297 ; 451.194,-50.021 458.828,-42.388 ; 451.208,37.153 454.256,40.201 457.304,43.249 458.828,44.773 ; 452.718,-50.021 458.828,-43.912 ; 452.732,37.153 455.78,40.201 458.828,43.249 ; 454.242,-50.021 458.828,-45.436 ; 454.256,37.153 457.304,40.201 458.828,41.725 ; 455.766,-50.021 458.828,-46.96 ; 455.78,37.153 458.828,40.201 ; 457.29,-50.021 458.828,-48.484 ; 457.304,37.153 458.828,38.677
  Top w0.381: 343.542,40.201 353.954,40.201 377.569,40.201 399.408,40.201 415.913,40.201 430.388,40.201 458.828,40.201 ; 343.542,43.249 353.954,43.249 377.569,43.249 399.408,43.249 415.913,43.249 430.388,43.249 458.828,43.249 ; 343.542,46.297 353.954,46.297 377.569,46.297 399.408,46.297 415.913,46.297 430.388,46.297 458.828,46.297 ; 343.542,49.345 353.954,49.345 377.569,49.345 399.408,49.345 415.913,49.345 430.388,49.345 458.828,49.345 ; 343.542,52.393 353.954,52.393 377.569,52.393 399.408,52.393 415.913,52.393 430.388,52.393 458.828,52.393 ; 343.542,55.441 353.954,55.441 377.569,55.441 399.408,55.441 415.913,55.441 430.388,55.441 458.828,55.441 ; 343.542,58.489 353.954,58.489 377.569,58.489 399.408,58.489 415.913,58.489 430.388,58.489 458.828,58.489 ; 343.542,61.537 353.954,61.537 377.569,61.537 399.408,61.537 415.913,61.537 430.388,61.537 458.828,61.537 ; 343.542,64.585 353.954,64.585 377.569,64.585 399.408,64.585 415.913,64.585 430.388,64.585 458.828,64.585 ; 343.542,67.633 353.954,67.633 377.569,67.633 399.408,67.633 415.913,67.633 430.388,67.633 458.828,67.633 ; 343.542,70.681 458.828,70.681 ; 353.954,73.729 353.954,37.153 ; 377.569,73.729 377.569,37.153 ; 399.408,73.729 399.408,37.153 ; 415.913,73.729 415.913,37.153 ; 430.388,73.729 430.388,37.153 ; 353.954,37.153 343.542,37.153 343.542,73.729 458.828,73.729 458.828,37.153 430.388,37.153 ; 353.954,37.153 377.569,37.153 ; 377.569,37.153 399.408,37.153 ; 399.408,37.153 415.913,37.153 ; 415.913,37.153 430.388,37.153 ; 343.542,-50.008 343.542,36.391 458.828,36.391 458.828,-50.008 343.542,-50.008

## Polygon pours and split planes (outlines as drawn)
GND on GND (split plane): 88.39,-12.19 13.2,-12.19 13.2,-8.605 -2.858,-8.605 -2.858,-8.608 -5.562,-8.608 -5.687,-8.608 -7.937,-8.608 -8.261,-8.608 -8.261,-12.108 -7.937,-12.108 -7.937,-11.233 -5.687,-11.233 -3.187,-11.233 -3.187,-12.108 -2.858,-12.108 -2.858,-12.19 -9.6,-12.19 -9.6,-12.108 -9.439,-12.108 -9.439,-8.608 -9.612,-8.608 -13.364,-8.608 -13.364,-12.19 -88.39,-12.19 -88.39,120.039 88.39,120.039
GND on GND (split plane): -3.187,-11.108 -5.562,-11.108 -5.562,-8.733 -3.187,-8.733
3V3 on PWR (split plane): 88.39,-12.19 13.2,-12.19 13.2,-8.605 -0.6,-8.605 -0.6,-8.608 -0.812,-8.608 -3.312,-8.608 -3.437,-8.608 -5.562,-8.608 -5.687,-8.608 -7.937,-8.608 -8.261,-8.608 -8.261,-12.108 -7.937,-12.108 -7.937,-11.233 -0.937,-11.233 -0.937,-12.108 -0.6,-12.108 -0.6,-12.19 -9.6,-12.19 -9.6,-12.108 -9.439,-12.108 -9.439,-8.608 -13.364,-8.608 -13.364,-12.19 -88.39,-12.19 -88.39,120.039 88.39,120.039
3V3 on PWR (split plane): -0.937,-11.108 -3.312,-11.108 -3.312,-8.733 -0.937,-8.733

## Other copper
Top:
  text "LAYER 1: TOP" at 276.797,134.959 h2.54
  text "Layer" at 345.32,71.443 h1.52
  text "Name" at 355.732,71.443 h1.52
  text "Material" at 379.347,71.443 h1.52
  text "Thickness" at 401.186,71.443 h1.52
  text "Constant" at 417.691,71.443 h1.52
  text "Board Layer Stack" at 432.166,71.443 h1.52
  text "Top Overlay" at 355.732,68.395 h1.52
  text "Top Solder" at 355.732,65.347 h1.52
  text "Solder Resist" at 379.347,65.347 h1.52
  text "0.39mil" at 401.186,65.347 h1.52
  text "3.5" at 417.691,65.347 h1.52
  text "1" at 345.32,62.299 h1.52
  text "Top" at 355.732,62.299 h1.52
  text "Copper" at 379.347,62.299 h1.52
  text "1.38mil" at 401.186,62.299 h1.52
  text "Dielectric 1" at 355.732,59.251 h1.52
  text "PP-006" at 379.347,59.251 h1.52
  text "4.80mil" at 401.186,59.251 h1.52
  text "4.2" at 417.691,59.251 h1.52
  text "2" at 345.32,56.203 h1.52
  text "GND" at 355.732,56.203 h1.52
  text "Copper" at 379.347,56.203 h1.52
  text "1.38mil" at 401.186,56.203 h1.52
  text "Dielectric 2" at 355.732,53.155 h1.52
  text "Core-009" at 379.347,53.155 h1.52
  text "45.28mil" at 401.186,53.155 h1.52
  text "4.2" at 417.691,53.155 h1.52
  text "3" at 345.32,50.107 h1.52
  text "PWR" at 355.732,50.107 h1.52
  text "Copper" at 379.347,50.107 h1.52
  text "1.38mil" at 401.186,50.107 h1.52
  text "Dielectric 3" at 355.732,47.059 h1.52
  text "PP-006" at 379.347,47.059 h1.52
  text "4.80mil" at 401.186,47.059 h1.52
  text "4.2" at 417.691,47.059 h1.52
  text "4" at 345.32,44.011 h1.52
  text "Bottom" at 355.732,44.011 h1.52
  text "Copper" at 379.347,44.011 h1.52
  text "1.38mil" at 401.186,44.011 h1.52
  text "Bottom Solder" at 355.732,40.963 h1.52
  text "Solder Resist" at 379.347,40.963 h1.52
  text "0.39mil" at 401.186,40.963 h1.52
  text "3.5" at 417.691,40.963 h1.52
  text "Bottom Overlay" at 355.732,37.915 h1.52
Bottom:
  text "LAYER 4: BOTTOM" at 276.797,121.942 h2.54
GND (plane layer: these items are gaps in the copper):
  rectangle: -13.364,-12.537 -9.6,-8.608
  rectangle: -2.858,-12.533 13.2,-8.605
  lines w1.016: -88.9,-12.7 -88.9,120.549 88.9,120.549 88.9,-12.7 -88.9,-12.7
  text "LAYER 2: GND" at 276.797,130.62 h2.54
PWR (plane layer: these items are gaps in the copper):
  rectangle: -13.364,-12.537 -9.6,-8.608
  rectangle: -0.6,-12.533 13.2,-8.605
  lines w1.016: -88.9,-12.7 -88.9,120.549 88.9,120.549 88.9,-12.7 -88.9,-12.7
  text "LAYER 3: PWR" at 276.797,126.281 h2.54

## Silkscreen, mask and mechanical layers (free items; w line width, h text height)
Top Overlay:
  text "TOP SILKSCREEN" at 276.797,143.637 h2.54
Bottom Overlay:
  text "BOTTOM SILKSCREEN" at 276.797,113.264 h2.54
Top Paste:
  text "TOP PASTEMASK" at 276.797,87.231 h2.54
Bottom Paste:
  text "BOTTOM PASTEMASK" at 276.797,65.536 h2.54
Top Solder:
  text "TOP SOLDERMASK" at 276.797,139.298 h2.54
Bottom Solder:
  text "BOTTOM SOLDERMASK" at 276.797,117.603 h2.54
Top Assembly:
  text "TOP ASSEMBLY" at 276.797,82.892 h2.54
Bottom Assembly:
  text "BOTTOM ASSEMBLY" at 276.797,61.197 h2.54
Top Designators:
  text "TOP DESIGNATORS" at 276.797,78.553 h2.54
Bottom Designators:
  text "BOTTOM DESIGNATORS" at 276.797,52.519 h2.54
Board Outline:
  text "BOARD OUTLINE" at 276.797,108.925 h2.54
Panel Outline:
  the board outline again, w0.127
  text "PANEL OUTLINE" at 276.797,104.586 h2.54
Route Tool Path:
  lines w2.54: -12.065,-12.7 12.065,-12.7
  text "ROUTE TOOL PATH" at 276.797,100.247 h2.54
  text "100 MIL ROUTER" at -105.476,99.039 h2
  text "100 MIL ROUTER" at 90.523,98.976 h2
  text "100 MIL ROUTER" at 90.852,5.423 h2
  text "100 MIL ROUTER" at -106.729,3.673 h2
Panel V-Grove:
  lines w0.127: -95.25,0 95.25,0 ; -95.25,107.849 95.25,107.849
  text "V-GROOVE" at 97.099,106.501 h2
  text "V-GROOVE" at -112.44,106.381 h2
  text "PANEL V-GROOVE" at 276.797,95.908 h2.54
  text "V-GROOVE" at 97.684,-1.067 h2
  text "V-GROOVE" at -112.287,-1.102 h2
Manufacturing Notes:
  text "MANUFACTURING NOTES" at 276.797,44.349 h2.54
Top 3D Models:
  text "TOP 3D MODELS" at 276.797,69.875 h2.54
Bottom 3D Models:
  text "BOTTOM 3D MODELS" at 276.797,48.18 h2.54
Top Courtyard:
  text "TOP COURTYARD" at 276.797,74.214 h2.54
Bottom Courtyard:
  text "BOTTOM COURTYARD" at 276.797,56.858 h2.54
Drill Drawing:
  circle w0.254: c345.506,139.275 r0.847
  circle w0.254: c345.506,116.415 r0.508
  circle w0.254: c345.506,116.415 r0.847
  lines w0.254: 344.66,96.942 345.083,96.942 345.506,96.519 345.93,96.942 346.353,96.942 345.93,97.365 346.353,97.789 345.93,97.789 345.506,98.212 345.083,97.789 344.66,97.789 345.083,97.365 344.66,96.942 ; 344.66,100.329 344.66,100.752 345.083,101.175 344.66,101.599 344.66,102.022 345.083,102.022 345.506,101.599 345.93,102.022 346.353,102.022 346.353,101.599 345.93,101.175 346.353,100.752 346.353,100.329 345.93,100.329 345.506,100.752 345.083,100.329 344.66,100.329 ; 344.66,105.832 346.353,105.832 345.506,104.139 344.66,105.832 ; 344.66,108.372 345.083,108.372 345.083,107.949 345.93,107.949 345.93,108.372 346.353,108.372 346.353,109.219 345.93,109.219 345.93,109.642 345.083,109.642 345.083,109.219 344.66,109.219 344.66,108.372 ; 344.66,111.759 346.353,111.759 346.353,113.452 344.66,113.452 344.66,111.759 ; 344.66,120.225 345.506,119.379 346.353,120.225 345.506,121.072 344.66,120.225 ; 344.66,123.189 345.506,123.612 346.353,123.189 345.93,124.035 346.353,124.882 345.506,124.459 344.66,124.882 345.083,124.035 344.66,123.189 ; 344.66,128.692 346.353,128.692 345.506,126.999 344.66,128.692 ; 344.66,131.232 345.083,131.232 345.506,130.809 345.93,131.232 346.353,131.232 345.93,131.655 346.353,132.079 345.93,132.079 345.506,132.502 345.083,132.079 344.66,132.079 345.083,131.655 344.66,131.232 ; 344.66,134.619 346.353,134.619 346.353,136.312 344.66,136.312 344.66,134.619 ; 344.998,97.111 345.252,97.111 345.506,96.857 345.76,97.111 346.014,97.111 345.76,97.365 346.014,97.619 345.76,97.619 345.506,97.873 345.252,97.619 344.998,97.619 345.252,97.365 344.998,97.111 ; 344.998,112.097 346.014,112.097 346.014,113.113 344.998,113.113 344.998,112.097 ; 344.998,128.353 346.014,128.353 345.506,127.337 344.998,128.353
  lines w0.381: 343.141,95.376 649.327,95.376 ; 343.141,141.096 649.327,141.096 ; 357.133,91.566 357.133,144.906 ; 373.639,91.566 373.639,144.906 ; 402.84,91.566 402.84,144.906 ; 415.689,91.566 415.689,144.906 ; 434.328,91.566 434.328,144.906 ; 464.545,91.566 464.545,144.906 ; 479.527,91.566 479.527,144.906 ; 507.205,91.566 507.205,144.906 ; 558.752,91.566 558.752,144.906 ; 580.437,91.566 580.437,144.906 ; 614.311,91.566 614.311,144.906 ; 343.141,91.566 649.327,91.566 649.327,144.906 343.141,144.906 343.141,91.566
  text "Symbol" at 345.427,142.239 h1.83
  text "Count" at 358.276,142.239 h1.83
  text "Hole Size" at 374.782,142.239 h1.83
  text "Plated" at 403.983,142.239 h1.83
  text "Hole Type" at 416.832,142.239 h1.83
  text "Drill Layer Pair" at 435.471,142.239 h1.83
  text "Via/Pad" at 465.688,142.239 h1.83
  text "Pad Shape" at 480.67,142.239 h1.83
  text "Template" at 508.348,142.239 h1.83
  text "Description" at 559.895,142.239 h1.83
  text "Hole Tolerance (+)" at 581.58,142.239 h1.83
  text "Hole Tolerance (-)" at 615.454,142.239 h1.83
  text "4" at 358.276,138.429 h1.52
  text "19.69mil (0.500mm)" at 374.782,138.429 h1.52
  text "PTH" at 403.983,138.429 h1.52
  text "Slot" at 416.832,138.429 h1.52
  text "Top - Bottom" at 435.471,138.429 h1.52
  text "Pad" at 465.688,138.429 h1.52
  text "Rounded Rectangle" at 480.67,138.429 h1.52
  text "r95_155h50_115r100m100_160(Tol5-5)" at 508.348,138.429 h1.52
  text "1.97mil (0.050mm)" at 581.58,138.429 h1.52
  text "1.97mil (0.050mm)" at 615.454,138.429 h1.52
  text "4" at 358.276,134.619 h1.52
  text "21.65mil (0.550mm)" at 374.782,134.619 h1.52
  text "PTH" at 403.983,134.619 h1.52
  text "Slot" at 416.832,134.619 h1.52
  text "Top - Bottom" at 435.471,134.619 h1.52
  text "Pad" at 465.688,134.619 h1.52
  text "Rounded Rectangle" at 480.67,134.619 h1.52
  text "r125_95h55_85r100m130_100(Tol5-5)" at 508.348,134.619 h1.52
  text "1.97mil (0.050mm)" at 581.58,134.619 h1.52
  text "1.97mil (0.050mm)" at 615.454,134.619 h1.52
  text "4" at 358.276,130.809 h1.52
  text "40.00mil (1.016mm)" at 374.782,130.809 h1.52
  text "PTH" at 403.983,130.809 h1.52
  text "Round" at 416.832,130.809 h1.52
  text "Top - Bottom" at 435.471,130.809 h1.52
  text "Pad" at 465.688,130.809 h1.52
  text "(Mixed)" at 480.67,130.809 h1.52
  text "(Mixed)" at 508.348,130.809 h1.52
  text "4" at 358.276,126.999 h1.52
  text "51.18mil (1.300mm)" at 374.782,126.999 h1.52
  text "PTH" at 403.983,126.999 h1.52
  text "Round" at 416.832,126.999 h1.52
  text "Top - Bottom" at 435.471,126.999 h1.52
  text "Pad" at 465.688,126.999 h1.52
  text "(Mixed)" at 480.67,126.999 h1.52
  text "(Mixed)" at 508.348,126.999 h1.52
  text "4" at 358.276,123.189 h1.52
  text "70.87mil (1.800mm)" at 374.782,123.189 h1.52
  text "PTH" at 403.983,123.189 h1.52
  text "Round" at 416.832,123.189 h1.52
  text "Top - Bottom" at 435.471,123.189 h1.52
  text "Pad" at 465.688,123.189 h1.52
  text "Rounded" at 480.67,123.189 h1.52
  text "c100h180" at 508.348,123.189 h1.52
  text "10" at 358.276,119.379 h1.52
  text "125.98mil (3.200mm)" at 374.782,119.379 h1.52
  text "NPTH" at 403.983,119.379 h1.52
  text "Round" at 416.832,119.379 h1.52
  text "Top - Bottom" at 435.471,119.379 h1.52
  text "Pad" at 465.688,119.379 h1.52
  text "Rounded" at 480.67,119.379 h1.52
  text "c320hn320" at 508.348,119.379 h1.52
  text "12" at 358.276,115.569 h1.52
  text "40.16mil (1.020mm)" at 374.782,115.569 h1.52
  text "PTH" at 403.983,115.569 h1.52
  text "Round" at 416.832,115.569 h1.52
  text "Top - Bottom" at 435.471,115.569 h1.52
  text "Pad" at 465.688,115.569 h1.52
  text "(Mixed)" at 480.67,115.569 h1.52
  text "(Mixed)" at 508.348,115.569 h1.52
  text "16" at 358.276,111.759 h1.52
  text "62.99mil (1.600mm)" at 374.782,111.759 h1.52
  text "PTH" at 403.983,111.759 h1.52
  text "Round" at 416.832,111.759 h1.52
  text "Top - Bottom" at 435.471,111.759 h1.52
  text "Pad" at 465.688,111.759 h1.52
  text "Rounded" at 480.67,111.759 h1.52
  text "c240h160" at 508.348,111.759 h1.52
  text "24" at 358.276,107.949 h1.52
  text "42.91mil (1.090mm)" at 374.782,107.949 h1.52
  text "PTH" at 403.983,107.949 h1.52
  text "Round" at 416.832,107.949 h1.52
  text "Top - Bottom" at 435.471,107.949 h1.52
  text "Pad" at 465.688,107.949 h1.52
  text "Rounded" at 480.67,107.949 h1.52
  text "c152h109m163" at 508.348,107.949 h1.52
  text "70" at 358.276,104.139 h1.52
  text "10.00mil (0.254mm)" at 374.782,104.139 h1.52
  text "PTH" at 403.983,104.139 h1.52
  text "Round" at 416.832,104.139 h1.52
  text "Top - Bottom" at 435.471,104.139 h1.52
  text "(Mixed)" at 465.688,104.139 h1.52
  text "Rounded" at 480.67,104.139 h1.52
  text "(Mixed)" at 508.348,104.139 h1.52
  text "488" at 358.276,100.329 h1.52
  text "39.37mil (1.000mm)" at 374.782,100.329 h1.52
  text "PTH" at 403.983,100.329 h1.52
  text "Round" at 416.832,100.329 h1.52
  text "Top - Bottom" at 435.471,100.329 h1.52
  text "Pad" at 465.688,100.329 h1.52
  text "(Mixed)" at 480.67,100.329 h1.52
  text "(Mixed)" at 508.348,100.329 h1.52
  text "728" at 358.276,96.519 h1.52
  text "11.81mil (0.300mm)" at 374.782,96.519 h1.52
  text "PTH" at 403.983,96.519 h1.52
  text "Round" at 416.832,96.519 h1.52
  text "Top - Bottom" at 435.471,96.519 h1.52
  text "Via" at 465.688,96.519 h1.52
  text "Rounded" at 480.67,96.519 h1.52
  text "v50h30" at 508.348,96.519 h1.52
  text "1368 Total" at 358.276,92.709 h1.52
  text "DRILL DRAWING" at 276.797,91.569 h2.54
  text "Slot definitions :" at 345.427,89.026 h1.52
  text "Routed Path Length" at 371.657,89.026 h1.52
  text "= Calculated from tool start centre position to tool end centre position." at 399.665,89.026 h1.52
  text "Hole Length" at 371.657,86.487 h1.52
  text "= Routed Path Length + Tool Size = Slot length as defined in the PCB layout" at 389.254,86.487 h1.52

## Text inside footprints (layer, text, board x,y; h text height)
Designator19: Top Paste "Half-Etched  / Lasered Text / DO NOT REMOVE" at 176.46,-120.341 h3.81; Top Paste "TOP" at 176.225,-185.74 h6.48; Top Paste "TOP" at 149.733,-97 h2.54; Top Paste "STENCIL THICKNESS -" at 145.192,-92.884 h0.89; Top Paste "VALID AREA - 240 x 340 mm" at -79.59,-115.624 h6.5; Top Paste "FRAME SIZE - 420 x 520 mm" at -77.05,179.016 h6.5; Top Paste "PCB Revision" at 54.533,-185.74 h6.48; Top Paste "PCB Revision" at 150.037,-90.744 h0.89; Top Paste "STENCIL THICKNESS -" at -74.477,-153.807 h6.5
Designator41: Top "1" at -7.06,-10.433 h2; Manufacturing Notes "Preserve Stacking Stripes Integrity during Router Tooling" at -6.485,-20.483 h1
Designator42: Bottom "4" at -0.492,-10.433 h2
Designator45: GND "2" at -4.737,-10.558 h2
Designator49: PWR "3" at -2.459,-10.556 h2
FID1: Top Paste "STENCIL / FIDUCIAL / HALF-ETCHED" at -84.484,-8.875 h0.76; Bottom Paste "STENCIL / FIDUCIAL / HALF-ETCHED" at -76.356,-8.875 h0.76
FID2: Top Paste "STENCIL / FIDUCIAL / HALF-ETCHED" at 70.133,114.213 h0.76; Bottom Paste "STENCIL / FIDUCIAL / HALF-ETCHED" at 78.261,114.213 h0.76
FID3: Top Paste "STENCIL / FIDUCIAL / HALF-ETCHED" at 69.99,-8.875 h0.76; Bottom Paste "STENCIL / FIDUCIAL / HALF-ETCHED" at 78.118,-8.875 h0.76